# Altium PCB xSignals.PcbDoc
Units mil, origin at the board's own origin, x right, y up, seen from the top; angles counter-clockwise.
Board outline 4055.12 x 2100 mil, 3 copper layers (Top Layer, GND, Bottom Layer), stack 68.617 mil thick; 14 components, 11 nets, 32 pads, 2 vias.
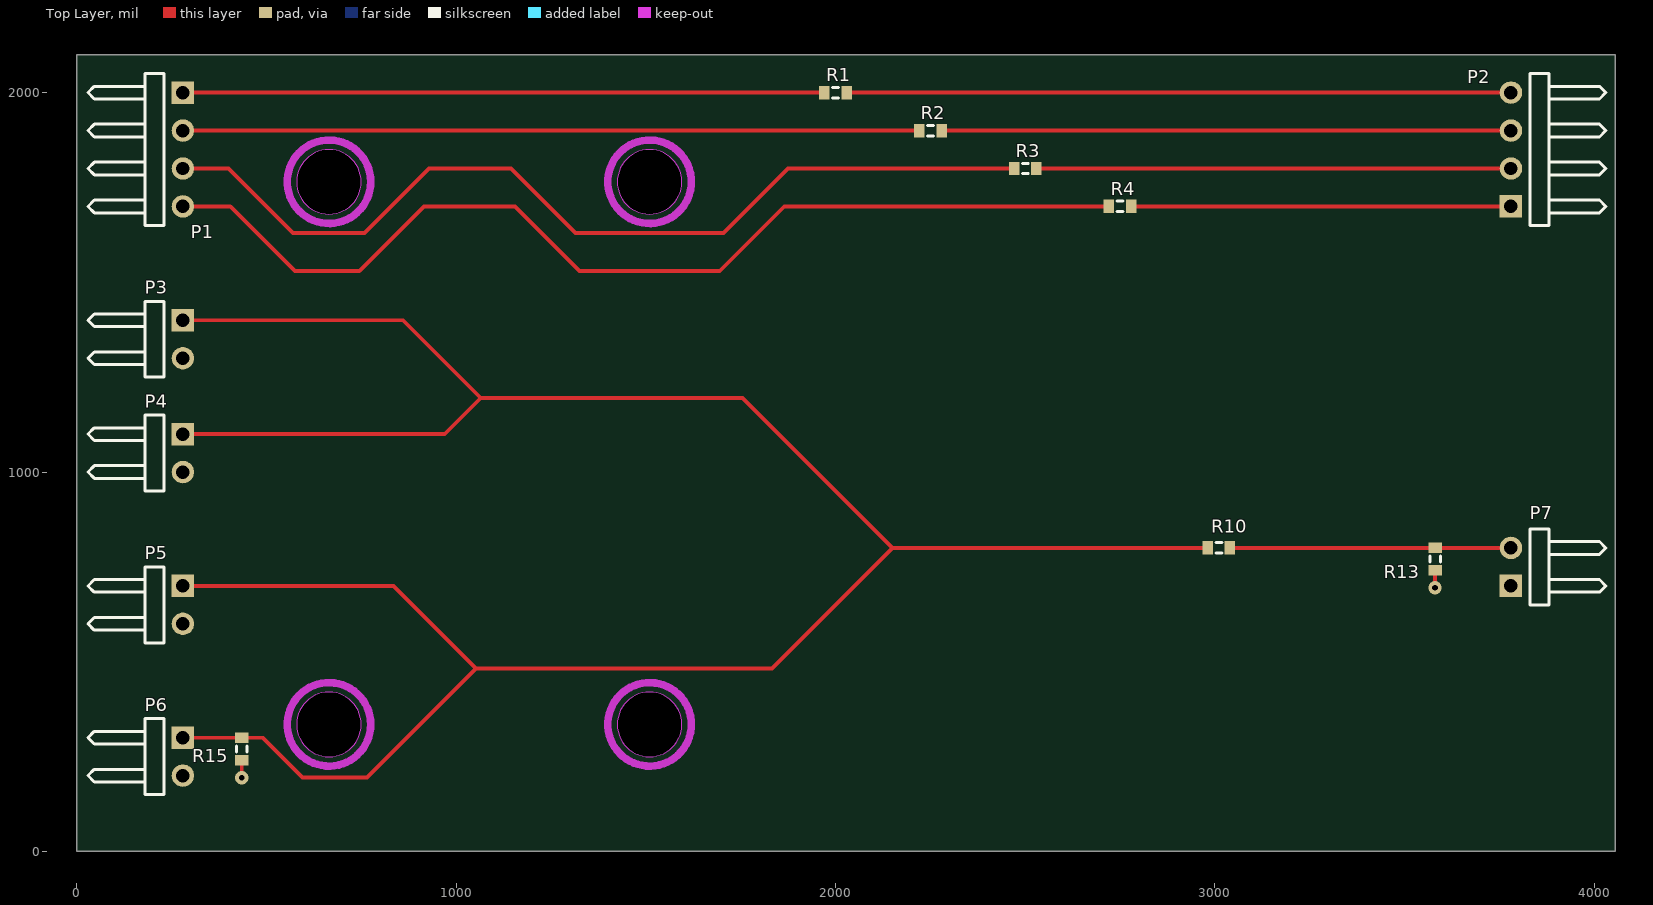
[diagram p0: Top Layer view]
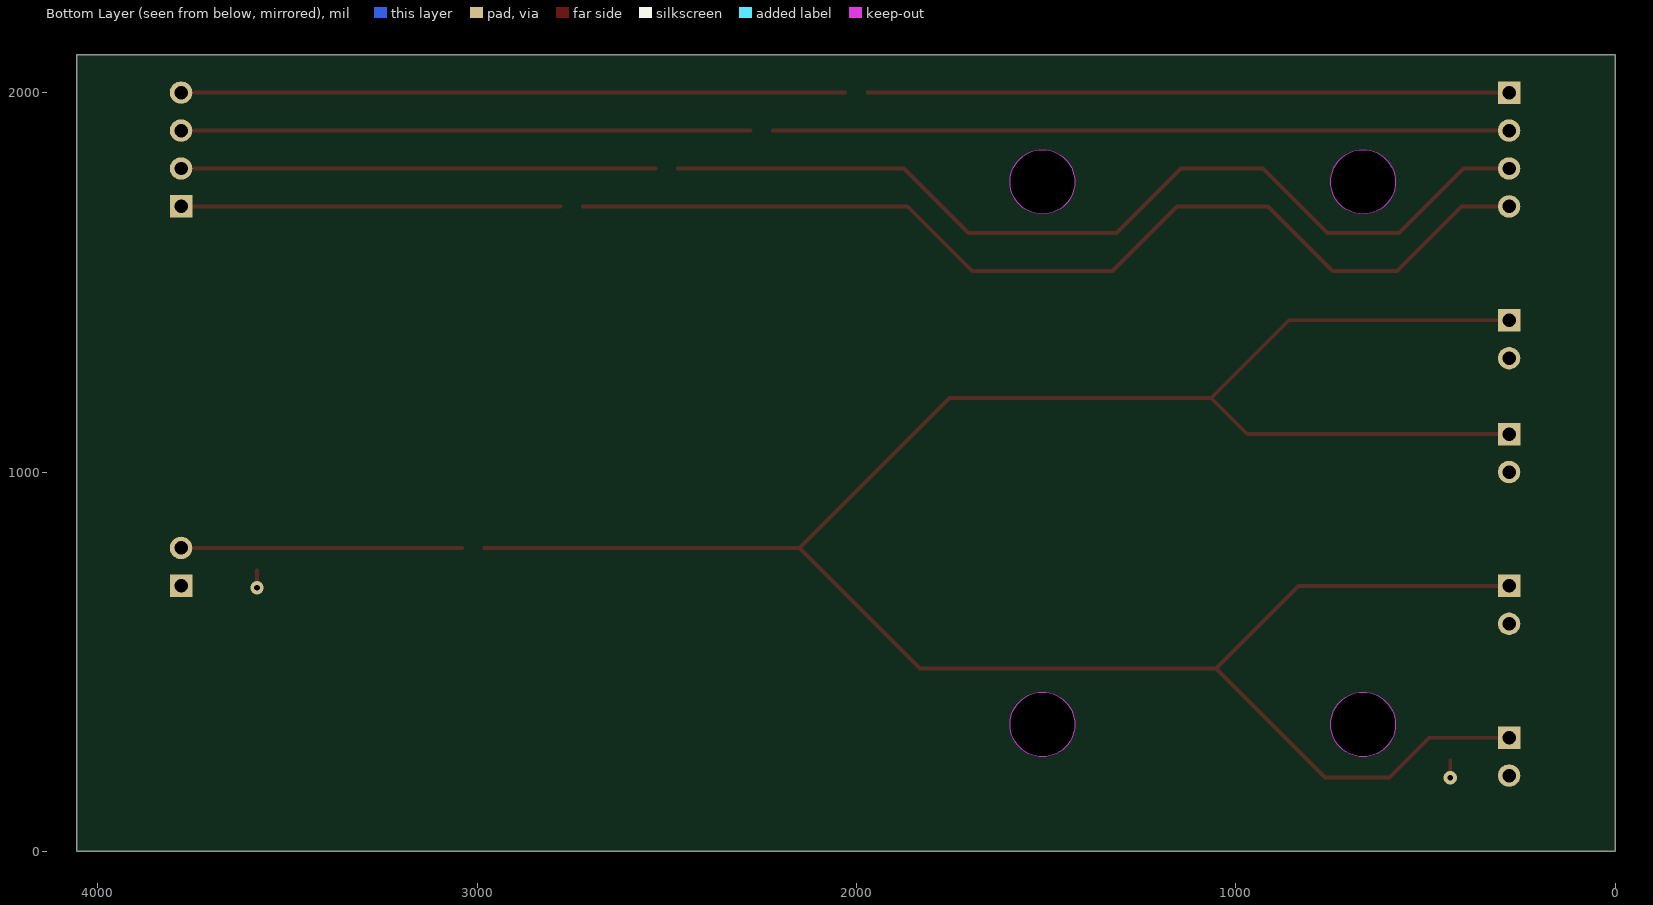
[diagram p1: Bottom Layer view, seen from below]
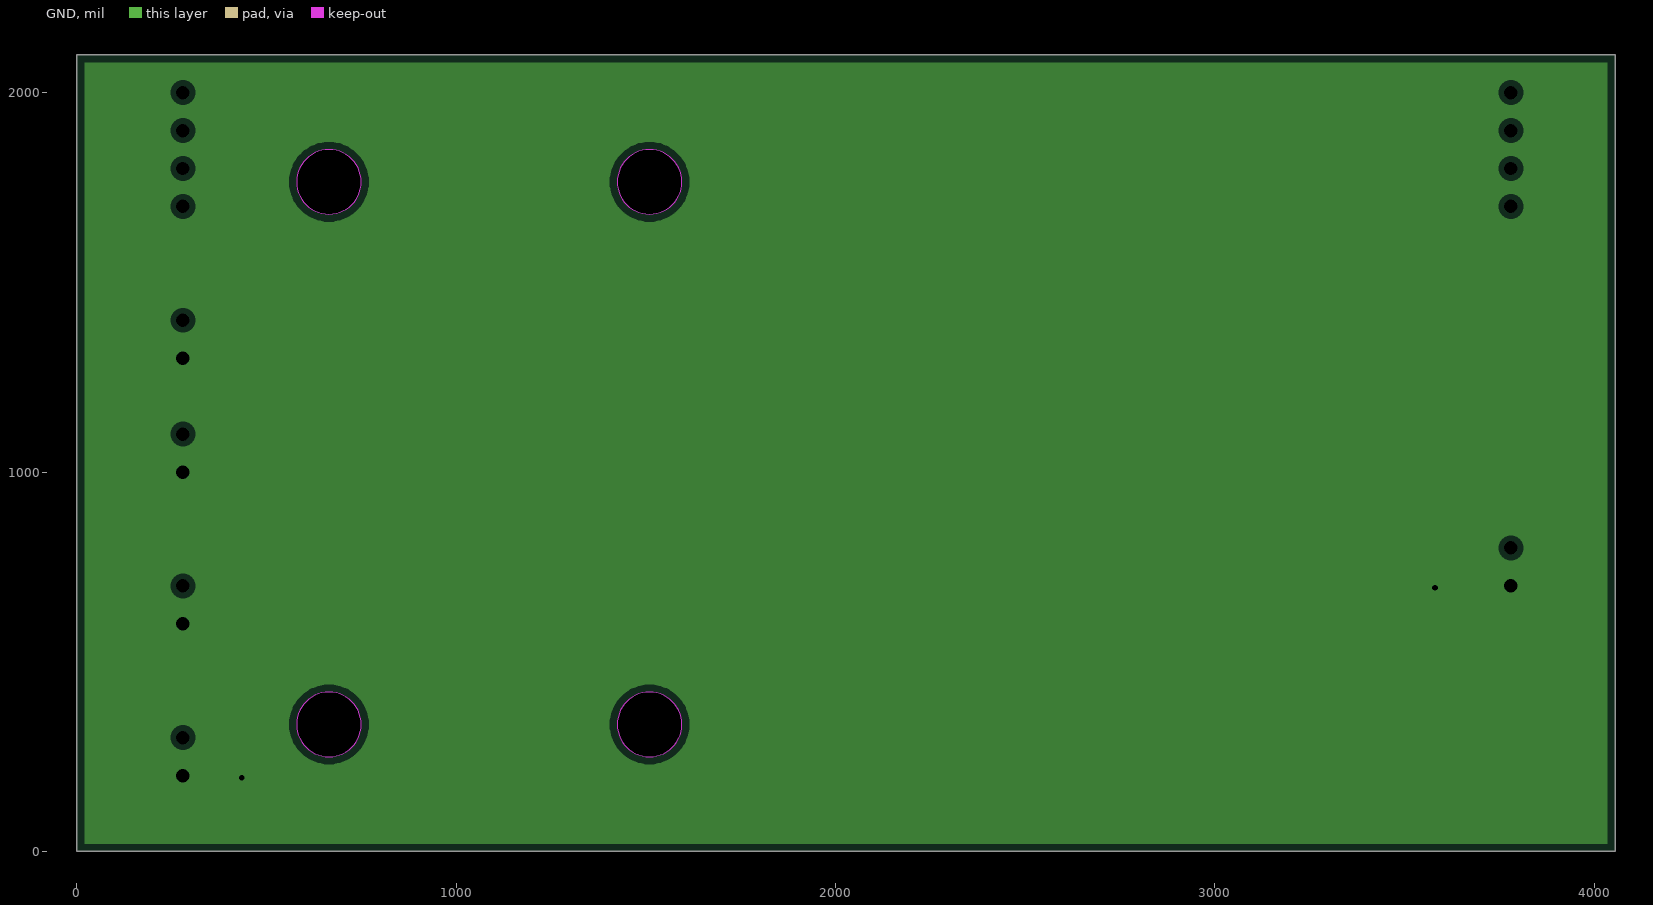
[diagram p2: GND, clearances drawn from the general rule]

## Layer stack, top to bottom
Top Solder: solder mask 0.4, Solder Resist, Dk 3.5
Top Layer: signal copper 1.4
Dielectric1: core 59.4, FR-4, Dk 4
GND: plane copper 1.417, net GND
Dielectric 2: prepreg 5, Dk 4.2
Bottom Layer: signal copper 1.4
Bottom Solder: solder mask 0.4, Solder Resist, Dk 3.5

## Board outline
0,0 4055.12,0 4055.12,2100 0,2100
cut-out: 579.65,334.79 ccw(c664.79,334.79) 664.79,249.65 ccw(c664.79,334.79) 749.94,334.79 ccw(c664.79,334.79) 664.79,419.94 ccw(c664.79,334.79)
cut-out: 579.65,1764.79 ccw(c664.79,1764.79) 664.79,1679.65 ccw(c664.79,1764.79) 749.94,1764.79 ccw(c664.79,1764.79) 664.79,1849.94 ccw(c664.79,1764.79)
cut-out: 1424.65,334.79 ccw(c1509.79,334.79) 1509.79,249.65 ccw(c1509.79,334.79) 1594.94,334.79 ccw(c1509.79,334.79) 1509.79,419.94 ccw(c1509.79,334.79)
cut-out: 1424.65,1764.79 ccw(c1509.79,1764.79) 1509.79,1679.65 ccw(c1509.79,1764.79) 1594.94,1764.79 ccw(c1509.79,1764.79) 1509.79,1849.94 ccw(c1509.79,1764.79)

## Design rules (kind name [scope] priority, off if disabled: settings)
AcuteAngle [All] p1: minimum=5.50000000000000E+0001 checktracksonly=FALSE
AssemblyTestPointUsage [All] p1 off:
AssemblyTestpoint [All] p1 off: testpointundercomponent=TRUE minsize=40 maxsize=100 preferedsize=60 minholesize=0 maxholesize=40 preferedholesize=32 testpointgrid=1 usegrid=TRUE gridtolerance=0.01 allowsidetop=TRUE allowsidebottom=TRUE
BoardOutlineClearance [All] p1: gap=10 ignorepadtopadclearanceinfootprint=FALSE except(0: Arc-SplitContinuation Track-SplitContinuation SMDPad-SplitContinuation THPad-SplitContinuation Via-SplitContinuation Fill-SplitContinuation Poly-SplitContinuation Region-SplitContinuation Text-SplitContinuation)
Clearance [All] p1: gap=8 ignorepadtopadclearanceinfootprint=FALSE except(0: Arc-Hole Track-Hole SMDPad-Hole THPad-Hole Via-Hole Fill-Hole Poly-Hole Region-Hole Text-Hole)
FabricationTestPointUsage [All] p1 off: valid=0 allowmultiple=FALSE
FabricationTestpoint [(IsPad And (OnTopLayer Or OnBottomLayer))] p1 off: side=3 testpointundercomponent=TRUE minsize=40 maxsize=100 preferedsize=60 minholesize=0 maxholesize=40 preferedholesize=32 testpointgrid=1 allowsidetop=TRUE allowsidebottom=TRUE usegrid=TRUE gridtolerance=0.01
Height [All] p1: minheight=0 maxheight=1500 prefheight=500
HoleSize [All] p1: absolutevalues=TRUE maxlimit=200 minlimit=10 maxpercent=80.000 minpercent=20.000
HoleToHoleClearance [All] p1: gap=1 allowstackedmicrovias=FALSE
MinimumAnnularRing [All] p1: minimumring=5
MinimumSolderMaskSliver [All] p1: minsoldermaskwidth=3
NetAntennae [All] p1: netantennaetolerance=5
PlaneClearance [All] p1: clearance=15
PlaneConnect [All] p1: planeconnectstyle=Relief reliefexpansion=15 reliefentries=4 reliefconductorwidth=8 reliefairgap=8
PolygonConnect [All] p1: connectstyle=Relief reliefconductorwidth=8 reliefentries=4 polygonreliefangle="90 Angle" airgapwidth=10
RoutingTopology RoutingTopology_TJUNCT [InNet('TJUNCT')] p1: topology=Starburst
RoutingTopology [All] p2: topology=Shortest
RoutingVias [All] p1: holewidth=10 width=20 viastyle="Through Hole" minholewidth=10 minwidth=20 maxholewidth=30 maxwidth=40
SilkToSilkClearance [All] p1: silktosilkclearance=1
SilkToSolderMaskClearance SilkscreenOverComponentPads [IsPad] p1: minsilkscreentomaskgap=2 clearancetoexposedcopper=TRUE
SolderMaskExpansion [All] p1: expansion=1 istentingtop=FALSE
Width [All] p1: maxlimit=200 minlimit=8 preferedwidth=10
16 further rules are at their usual default settings.

## Components (designator, comment, footprint, x,y, rotation, side; value= is the part's Value field where it differs from the comment)
P1 "Header 4H" HDR1X4H 280,2000 r270 top
P2 "Header 4H" HDR1X4H 3780,1700 r90 top
P3 "Header 2H" HDR1X2H 280,1400 r270 top
P4 "Header 2H" HDR1X2H 280,1100 r270 top
P5 "Header 2H" HDR1X2H 280,700 r270 top
P6 "Header 2H" HDR1X2H 280,300 r270 top
P7 "Header 2H" HDR1X2H 3780,700 r90 top
R1 "Res3" J1-0603 2000,2000 r180 top
R2 "Res3" J1-0603 2250,1900 r180 top
R3 "Res3" J1-0603 2500,1800 r180 top
R4 "Res3" J1-0603 2750,1700 r180 top
R10 "Res3" J1-0603 3010,800 r180 top
R13 "Res3" J1-0603 3580,770.47 r90 top
R15 "Res3" J1-0603 435,270 r90 top

## Footprints (in the part's own frame and the unit in brackets; to place one, negate y for a bottom-side part, rotate by r counter-clockwise, add the part's x,y. Pads: shape width x height; smd on the part's side, far side on the other; paste and mask are expansions set on the pad)
HDR1X2H [mm] "Connector; Header; 2 Position; Right Angle"
  rect 1.5x1.5 hole 0.9: 1(0,0)
  round 1.5 hole 0.9: 2(2.54,0)
  silkscreen extent -1.27,-6.35 3.81,-1.27
HDR1X4H [mm] "Connector; Header; 4 Position; Right Angle"
  rect 1.5x1.5 hole 0.9: 1(0,0)
  round 1.5 hole 0.9: 2(2.54,0) 3(5.08,0) 4(7.62,0)
  silkscreen extent -1.27,-6.35 8.89,-1.27
J1-0603 [mm] "Chip Resistor, Body 1.6x0.8mm, IPC High Density"
  rect 0.7x0.9 smd: 1(-0.75,0) 2(0.75,0)
  silkscreen extent -0.2,-0.35 0.2,0.35, body extent -0.85,-0.48 0.85,0.48, height 0.9

## Part data
P1 P2: "Header, 4-Pin, Right Angle"
P3 P4 P5 P6 P7: "Header, 2-Pin, Right Angle"
R1 R2 R3 R4 R10 R13 R15: "Resistor"

## Via types
v1: diameter 35, hole 15, Top Layer to Bottom Layer, 2 vias

## Nets (pads, with @x,y where several pads share a name; then routed paths per layer and width w, separated by ;. In a path a pad name is that pad's centre, name@x,y a point inside that pad or via, vN(x,y) a via of type N, cw(c..) or ccw(c..) an arc to the next point about the centre after c; other vN are vias at no path point)
BUS1: P1.1 R1.2 | length 1690.5
  Top Layer w10: P1.1 R1.2
BUS2: P1.2 R2.2 | length 1940.5
  Top Layer w10: P1.2 R2.2
BUS3: P1.3 R3.2 | length 2472.1
  Top Layer w10: P1.3 400,1800 570,1630 758.75,1630 928.75,1800 1145,1800 1315,1630 1705,1630 1875,1800 R3.2
BUS4: P1.4 R4.2 | length 2722.1
  Top Layer w10: P1.4 405,1700 575,1530 745,1530 915,1700 1155,1700 1325,1530 1695,1530 1865,1700 R4.2
GND: P3.2 P4.2 P5.2 P6.2 P7.1 R13.1 R15.1 | length 91.9
  Top Layer w10: v1(435,194.53) R15.1 ; v1(3580,695) R13.1
OBUS1: P2.4 R1.1 | length 1750.6
  Top Layer w10: R1.1 2029.66,2000.13 3676.72,2000.13 3676.86,2000 P2.4
OBUS2: P2.3 R2.1 | length 1500.5
  Top Layer w10: R2.1 3695,1900 P2.3
OBUS3: P2.2 R3.1 | length 1250.5
  Top Layer w10: R3.1 3655,1800 P2.2
OBUS4: P2.1 R4.1 | length 1000.5
  Top Layer w10: R4.1 3610,1700 P2.1
TJSOURCE: P7.2 R10.1 R13.2 | length 740.5
  Top Layer w10: R10.1 R13.2 P7.2
TJUNCT: P3.1 P4.1 P5.1 P6.1 R10.2 R15.2 | length 6800.4
  Top Layer w10: P6.1 434.53,300 R15.2 435.47,300 490,300 595,195 765,195 1052.5,482.5 ; P5.1 835,700 1052.5,482.5 ; P4.1 970,1100 1065,1195 ; P3.1 860,1400 1065,1195 ; R10.2 2150,800 ; 1052.5,482.5 1832.5,482.5 2150,800 ; 1065,1195 1755,1195 2150,800

## Polygon pours and split planes (outlines as drawn)
GND on GND (split plane): 4035.02,20.1 20.1,20.1 20.1,2079.9 4035.02,2079.9

## Keep-outs
Top Layer:
  circle w20: c665,335 r110
  circle w20: c665,1765 r110
  circle w20: c1510,335 r110
  circle w20: c1510,1765 r110

## Silkscreen, mask and mechanical layers (free items; w line width, h text height)
Top Overlay:
  text "Altium Advanced Training: '.Pcb_File_Name_No_Path'" at 15,-261.68 h100
Mechanical 1:
  drawing of 211 lines, arcs and shapes, not listed
  text "Layer" at -5222.5,-212.5 h60
  text "Name" at -4874.26,-212.5 h60
  text "Material" at -4109.54,-212.5 h60
  text "Thickness" at -3447.08,-212.5 h60
  text "Constant" at -2933.16,-212.5 h60
  text "Board Layer Stack" at -2440.37,-212.5 h60
  text "Top Overlay" at -4874.26,-332.5 h60
  text "Top Solder" at -4874.26,-452.5 h60
  text "Solder Resist" at -4109.54,-452.5 h60
  text "0,40mil" at -3447.08,-452.5 h60
  text "3.5" at -2933.16,-452.5 h60
  text "1" at -5222.5,-572.5 h60
  text "Top Layer" at -4874.26,-572.5 h60
  text "1,40mil" at -3447.08,-572.5 h60
  text "Dielectric1" at -4874.26,-692.5 h60
  text "FR-4" at -4109.54,-692.5 h60
  text "59,40mil" at -3447.08,-692.5 h60
  text "4" at -2933.16,-692.5 h60
  text "2" at -5222.5,-812.5 h60
  text "GND" at -4874.26,-812.5 h60
  text "1,42mil" at -3447.08,-812.5 h60
  text "Dielectric 2" at -4874.26,-932.5 h60
  text "5,00mil" at -3447.08,-932.5 h60
  text "4.2" at -2933.16,-932.5 h60
  text "3" at -5222.5,-1052.5 h60
  text "Bottom Layer" at -4874.26,-1052.5 h60
  text "1,40mil" at -3447.08,-1052.5 h60
  text "Bottom Solder" at -4874.26,-1172.5 h60
  text "Solder Resist" at -4109.54,-1172.5 h60
  text "0,40mil" at -3447.08,-1172.5 h60
  text "3.5" at -2933.16,-1172.5 h60
  text "Bottom Overlay" at -4874.26,-1292.5 h60
Mechanical 16:
  lines w5: -5810.13,-1827.43 -5610.13,-1827.43 ; -5810.13,547.57 -5610.13,547.57 ; -5810.13,2922.57 -5610.13,2922.57 ; -3310.13,-4202.43 -3310.13,-4002.43 ; -3310.13,5097.57 -3310.13,5297.57 ; -810.13,-4202.43 -810.13,-4002.43 ; -810.13,5097.57 -810.13,5297.57 ; 1536.87,-4002.43 1536.87,-3207.43 ; 1689.87,-4202.43 1689.87,-4002.43 ; 1689.87,5097.57 1689.87,5297.57 ; 3089.87,-3207.43 1536.87,-3207.43 ; 3089.87,-2934.43 1536.87,-2934.43 1536.87,-3207.43 ; 4189.87,-4202.43 4189.87,-4002.43 ; 4189.87,5097.57 4189.87,5297.57 ; 4489.87,-3702.43 8989.87,-3702.43 ; 4489.87,-3402.43 8989.87,-3402.43 ; 4489.87,-3102.43 5989.87,-3102.43 ; 5989.72,-4002.28 5989.72,-3402.28 5989.72,-2802.28 8989.72,-2802.28 8989.72,-4002.28 ; 5989.87,-2802.43 4489.87,-2802.43 ; 6613.21,-4202.75 6613.21,-4002.75 ; 6689.87,-4202.43 6689.87,-4002.43 ; 6689.87,5097.57 6689.87,5297.57 ; 7259.72,-4002.28 7259.72,-3702.28 ; 8089.72,-4002.28 8089.72,-3402.28 ; 8989.87,-1827.43 9189.87,-1827.43 ; 8989.87,547.57 9189.87,547.57 ; 8989.87,2922.57 9189.87,2922.57 ; 4489.87,-4002.43 4489.87,-2802.43 ; 4489.87,-4002.43 8989.87,-4002.43 ; 4489.87,-4002.43 3089.87,-4002.43 3089.87,-2802.43 4489.87,-2802.43 ; 8989.87,-4002.43 8989.87,5097.57 -5610.13,5097.57 -5610.13,-4002.43 8989.87,-4002.43 ; -5810.13,-4202.43 -5810.13,5297.57 9189.87,5297.57 9189.87,-4202.43 -5810.13,-4202.43
  lines w10: 6539.87,4817.57 6539.87,4892.57 6539.87,4957.57 6539.87,5032.57 6539.87,5097.57 ; 6540,4817.57 8989.87,4817.57 ; 6540,4892.57 8989.87,4892.57 8989.87,5032.57 ; 6540,4957.57 8989.87,4957.57 ; 6540,5032.57 8989.87,5032.57 ; 6540,5097.57 8989.87,5097.57 8989.87,5032.57 ; 6684.87,4817.76 6684.87,5032.57 ; 7014.87,4817.76 7014.87,5032.57 ; 8419.87,4817.76 8419.87,5032.57 ; 8689.87,4817.76 8689.87,5032.57
  text "1" at -4578.79,5167.57 h70
  text "2" at -2083.13,5167.57 h70
  text "3" at 406.21,5167.57 h70
  text "4" at 2912.88,5167.57 h70
  text "5" at 5411.87,5167.57 h70
  text "6" at 7916.87,5167.57 h70
  text "REVISIONS" at 7642,5051.76 h30
  text "DESCRIPTION" at 7630,4980.76 h30
  text "REV" at 6564.87,4977.57 h30
  text "ECO#/ECR#" at 6724.87,4977.57 h30
  text "APPROV" at 8454.87,4977.57 h30
  text "DATE" at 8794.87,4977.57 h30
  text "01" at 6584.87,4912.57 h30
  text "INITIAL RELEASE" at 7054.87,4912.57 h30
  text "10/31/11" at 8734.87,4912.57 h30
  text "A" at -5735.13,4024.57 h70
  text "A" at 9064.87,4024.57 h70
  text "B" at -5735.13,1644.57 h70
  text "B" at 9064.87,1644.57 h70
  text "C" at -5735.13,-730.43 h70
  text "C" at 9064.87,-730.43 h70
  text "ENGINEER:" at 4539.87,-2902.43 h45
  text "TITLE:" at 6039.72,-2902.28 h45
  text "<YOUR NAME>" at 4646.87,-3053.43 h80
  text "Company" at 3158,-3074.24 h140
  text "D" at -5735.13,-3100.43 h70
  text "D" at 9064.87,-3100.43 h70
  text "PCB DESIGNER:" at 4539.87,-3197.43 h45
  text "UNLESS OTHERWISE SPECIFIED" at 1626.87,-3313.43 h55.31
  text "<YOUR NAME>" at 4644.87,-3376.43 h80
  text "DIMINSIONS ARE IN INCHES." at 1626.87,-3401.43 h55.31
  text "LAYER" at 6040.72,-3475.28 h45
  text "DATE:" at 4539.87,-3502.43 h45
  text "REV:" at 8139.72,-3502.28 h45
  text "TOLERANCES ARE:" at 1954.87,-3580.43 h55.31
  text ".PRINT_DATE" at 4589.87,-3622.43 h70
  text "01" at 8474.72,-3636.3 h130
  text "100 Main Street" at 3126.5,-3638.02 h56.25
  text "DECIMALS" at 1616.87,-3704.43 h55.31
  text "ANGLES" at 2576.87,-3720.43 h55.31
  text "AnytownUSA, CA 12345" at 3124.37,-3734.35 h56.25
  text "SHT NO:" at 7280.72,-3792.28 h45
  text ".XX  +/- .01" at 1612.87,-3800.43 h55.31
  text "FILE NAME:" at 4539.87,-3802.43 h45
  text "DWG NO:" at 6039.72,-3802.28 h45
  text "SCALE:" at 8139.72,-3802.28 h45
  text "+/- .5 DEG" at 2456.87,-3817.43 h55.31
  text "Phone: (123) 555-1212" at 3122.21,-3832.82 h55.31
  text ".XXX +/- .003" at 1612.87,-3906.43 h55.31
  text "name@company.com" at 3122.21,-3914.2 h56.25
  text ".PCB_FILE_NAME_NO_PATH" at 4589.83,-3922.38 h70
  text ".PCB_FILE_NAME_NO_PATH" at 4589.87,-3922.43 h70
  text "N/A" at 8414.72,-3926.28 h130
  text "of" at 7661.67,-3949.61 h75
  text "1" at -4578.79,-4132.43 h70
  text "2" at -2083.13,-4132.43 h70
  text "3" at 406.21,-4132.43 h70
  text "4" at 2912.88,-4132.43 h70
  text "5" at 5411.87,-4132.43 h70
  text "4" at 7916.72,-4132.28 h70
Drill Drawing:
  circle w10: c-5248.98,-3104.28 r26.94
  lines w10: -5275.92,-3252.42 -5222.05,-3252.42 -5222.05,-3198.55 -5275.92,-3198.55 -5275.92,-3252.42
  lines w15: -5324.83,-3288.79 1089.13,-3288.79 ; -5324.83,-3046.36 1089.13,-3046.36 ; -4873.54,-3410 -4873.54,-2925.15 ; -4433.45,-3410 -4433.45,-2925.15 ; -3524.83,-3410 -3524.83,-2925.15 ; -3109.91,-3410 -3109.91,-2925.15 ; -2510.8,-3410 -2510.8,-2925.15 ; -1295.21,-3410 -1295.21,-2925.15 ; -812.42,-3410 -812.42,-2925.15 ; -203.62,-3410 -203.62,-2925.15 ; 453.65,-3410 453.65,-2925.15 ; -5324.83,-3410 1089.13,-3410 1089.13,-2925.15 -5324.83,-2925.15 -5324.83,-3410
  text "Symbol" at -5252.11,-3010 h58.18
  text "Count" at -4837.18,-3010 h58.18
  text "Hole Size" at -4397.09,-3010 h58.18
  text "Plated" at -3488.47,-3010 h58.18
  text "Hole Type" at -3073.54,-3010 h58.18
  text "Drill Layer Pair" at -2474.43,-3010 h58.18
  text "Via/Pad" at -1258.84,-3010 h58.18
  text "Pad Shape" at -776.06,-3010 h58.18
  text "Technology" at -167.26,-3010 h58.18
  text "Tolerance" at 490.02,-3010 h58.18
  text "2" at -4837.18,-3131.21 h48.48
  text "15,00mil (0,381mm)" at -4397.09,-3131.21 h48.48
  text "PTH" at -3488.47,-3131.21 h48.48
  text "Round" at -3073.54,-3131.21 h48.48
  text "Top Layer - Bottom Layer" at -2474.43,-3131.21 h48.48
  text "Via" at -1258.84,-3131.21 h48.48
  text "Rounded" at -776.06,-3131.21 h48.48
  text "v89h38" at -167.26,-3131.21 h48.48
  text "18" at -4837.18,-3252.42 h48.48
  text "35,43mil (0,900mm)" at -4397.09,-3252.42 h48.48
  text "PTH" at -3488.47,-3252.42 h48.48
  text "Round" at -3073.54,-3252.42 h48.48
  text "Top Layer - Bottom Layer" at -2474.43,-3252.42 h48.48
  text "Pad" at -1258.84,-3252.42 h48.48
  text "(Mixed)" at -776.06,-3252.42 h48.48
  text "(Mixed)" at -167.26,-3252.42 h48.48
  text "20 Total" at -4837.18,-3373.63 h48.48